# Altium PCB PCB.PcbDoc
Units mm, origin at the board's own origin, x right, y up, seen from the top; angles counter-clockwise.
Board outline 80 x 50 mm, 2 copper layers (Top Layer, Bottom Layer); 90 components, 124 nets, 399 pads, 259 vias.
Unrouted connection lines stored in the file: 2.
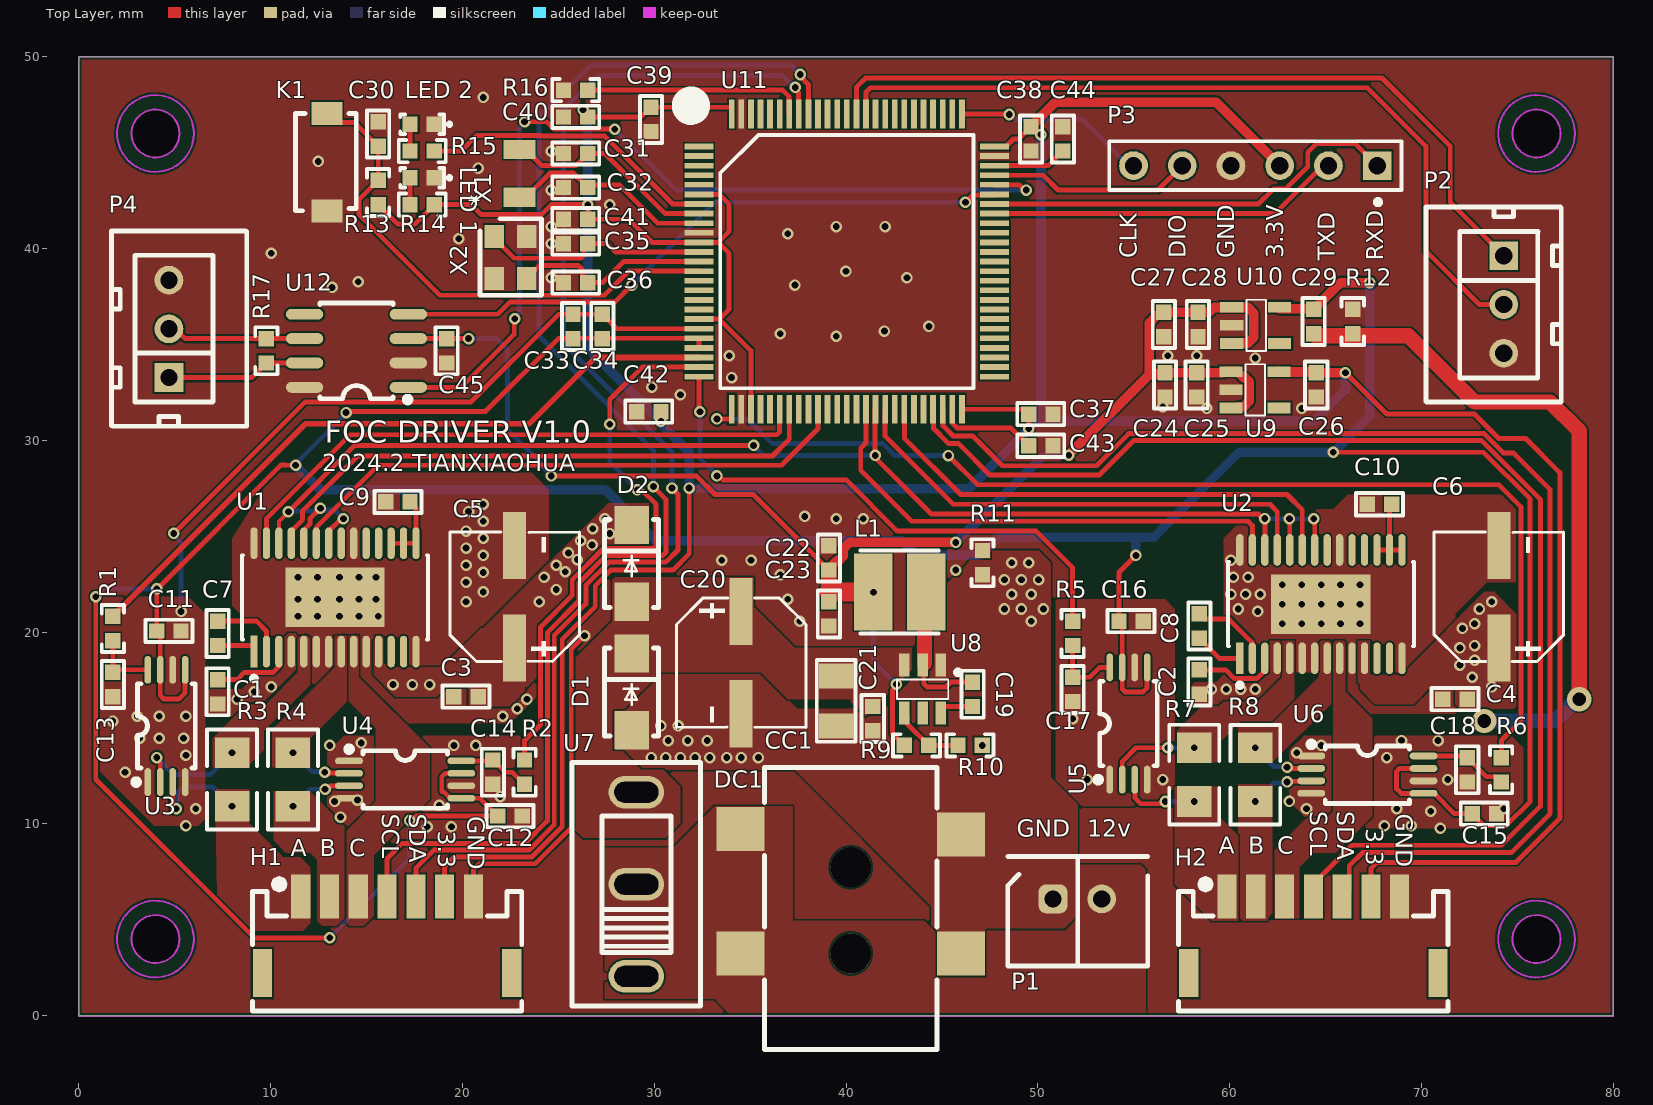
[diagram p0: Top Layer view]
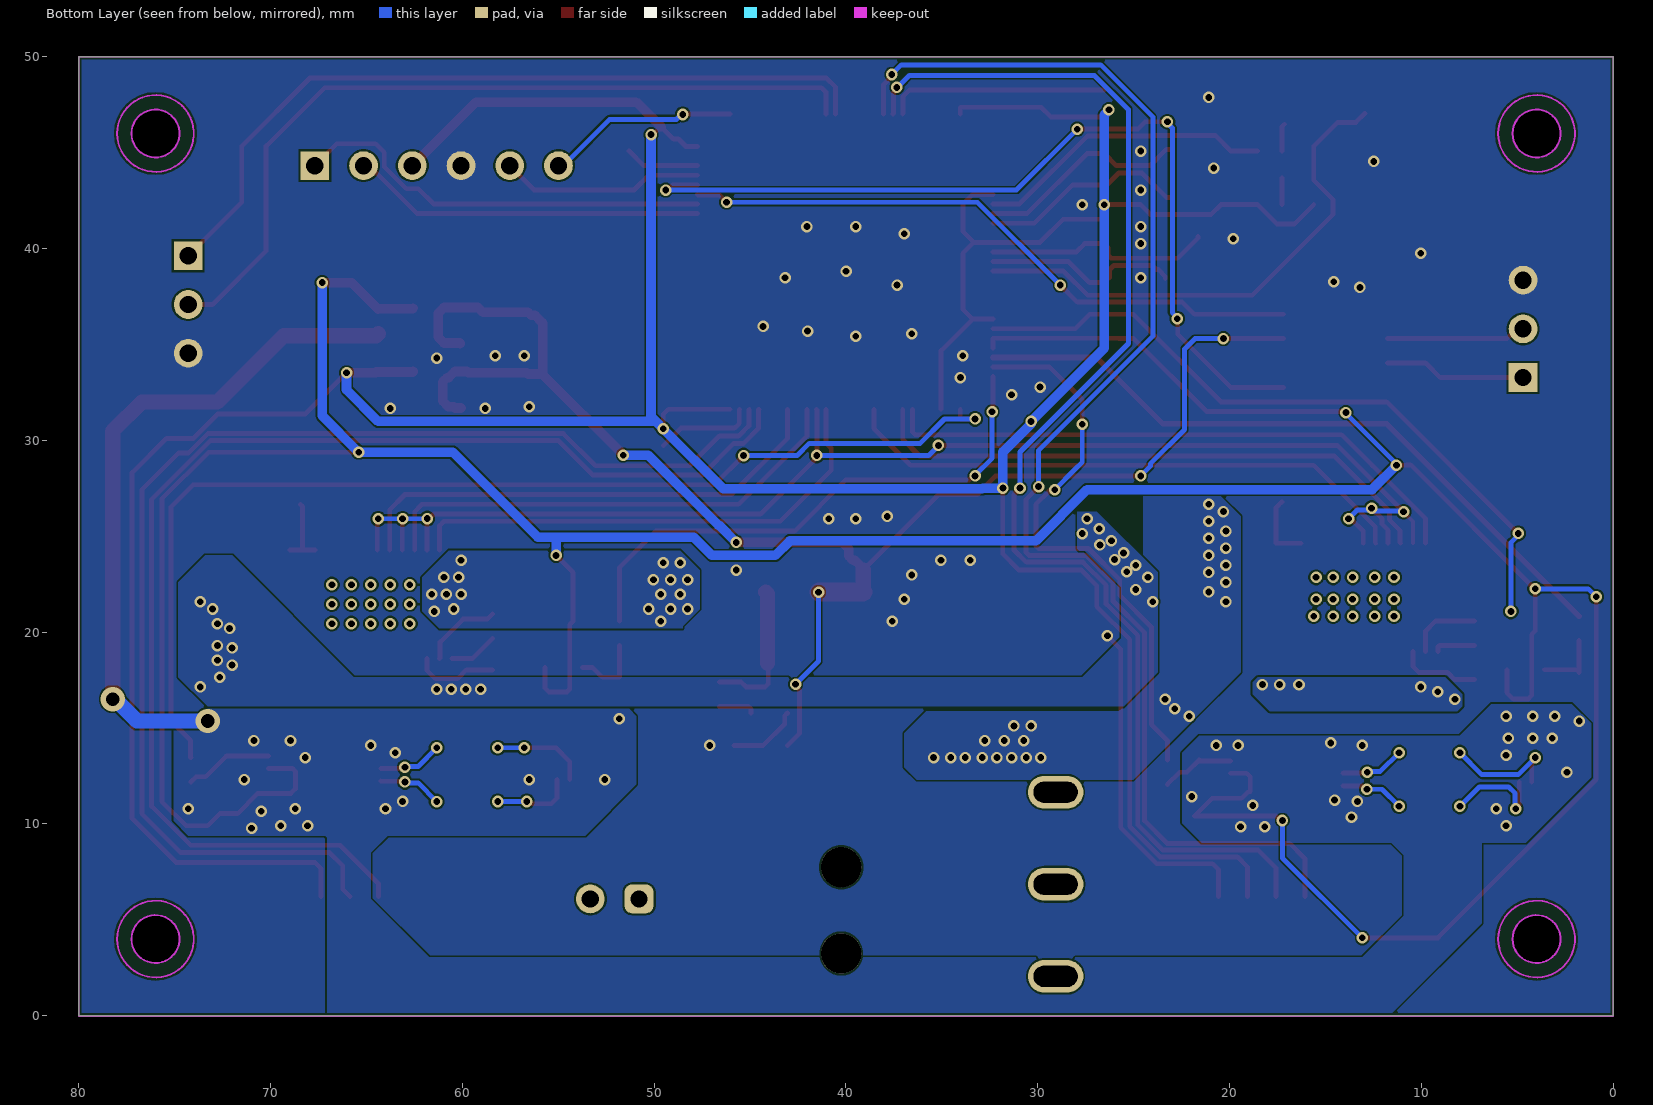
[diagram p1: Bottom Layer view, seen from below]
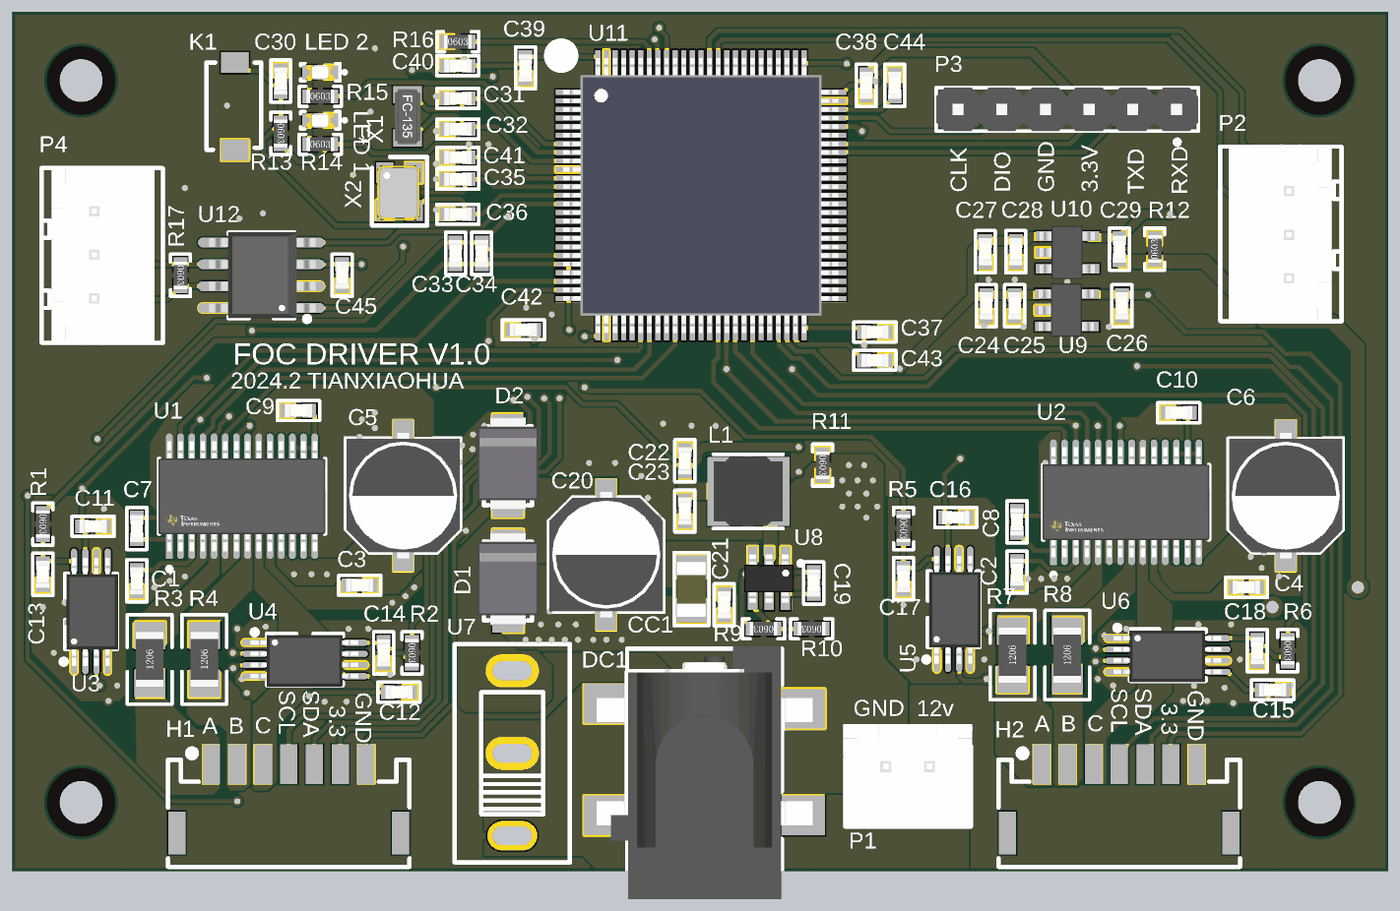
[diagram p2: 3D render of the assembled board from above, using the file's embedded part models]

## Layer stack, top to bottom
Top Solder: solder mask 0.0102, Solder Resist, Dk 3.5
Top Layer: signal copper 0.0356
Dielectric 1: dielectric 0.32, FR-4, Dk 4.8
Bottom Layer: signal copper 0.0356
Bottom Solder: solder mask 0.0102, Solder Resist, Dk 3.5

## Board outline
0,0 0,50 80,50 80,0
cut-out: 74.75,46 ccw(c76,46) 76,44.75 ccw(c76,46) 77.25,46 ccw(c76,46) 76,47.25 ccw(c76,46)
cut-out: 74.75,4 ccw(c76,4) 76,2.75 ccw(c76,4) 77.25,4 ccw(c76,4) 76,5.25 ccw(c76,4)
cut-out: 2.75,4 ccw(c4,4) 4,2.75 ccw(c4,4) 5.25,4 ccw(c4,4) 4,5.25 ccw(c4,4)
cut-out: 4,44.75 cw(c4,46) 2.75,46 cw(c4,46) 4,47.25 cw(c4,46) 5.25,46 cw(c4,46)

## Design rules (kind name [scope] priority, off if disabled: settings)
Clearance [All] p1: gap=0.1 ignorepadtopadclearanceinfootprint=FALSE except(0: Arc-Hole Track-Hole SMDPad-Hole THPad-Hole Via-Hole Fill-Hole Poly-Hole Region-Hole Text-Hole; 0.102: Arc-Arc Arc-Track Arc-SMDPad Arc-THPad Track-Track Track-SMDPad Track-THPad SMDPad-SMDPad SMDPad-THPad THPad-THPad; 0.127: Arc-Via Track-Via SMDPad-Via SMDPad-Text THPad-Via Via-Via; 0.254: Arc-Text Track-Text THPad-Text Via-Text Fill-Text Poly-Text Region-Text Text-Text)
HoleSize [All] p1: absolutevalues=TRUE maxlimit=30 minlimit=0.025 maxpercent=80.000 minpercent=20.000
HoleToHoleClearance [All] p1: gap=0.152 allowstackedmicrovias=TRUE
MinimumSolderMaskSliver [All] p1: minsoldermaskwidth=0
PlaneClearance [All] p1: clearance=0.254
PlaneConnect [All] p1: planeconnectstyle=Direct reliefexpansion=0.508 reliefentries=4 reliefconductorwidth=0.254 reliefairgap=0.254
PolygonConnect [All] p1: connectstyle=Direct reliefconductorwidth=0.254 reliefentries=4 polygonreliefangle="90 Angle" airgapwidth=0.254
RoutingVias [All] p1: holewidth=0.711 width=1.27 viastyle="Through Hole" minholewidth=0.3 minwidth=0.5 maxholewidth=30 maxwidth=30
SilkToSilkClearance [All] p1: silktosilkclearance=0
SilkToSolderMaskClearance [IsPad] p1: minsilkscreentomaskgap=0 clearancetoexposedcopper=TRUE
SolderMaskExpansion [All] p1: expansion=0.102 istentingtop=FALSE
Width [All] p1: maxlimit=3 minlimit=0.1 preferedwidth=0.254
23 further rules are at their usual default settings.

## Classes and differential pairs
component class Sheet3-can: C45 P4 R17 U12
component class Sheet0-MCU: C30 C31 C32 C33 C34 C35 C36 C37 C38 C39 C40 C41 C42 C43 C44 K1 "LED 1" "LED 2" P2 P3 R13 R14 R15 R16 U11 X1 X2
component class Sheet2-power: C19 C20 C21 C22 C23 C24 C25 C26 C27 C28 C29 CC1 D1 D2 DC1 L1 P1 R9 R10 R11 R12 U7 U8 U9 U10
component class Sheet1-driver: C1 C2 C3 C4 C5 C6 C7 C8 C9 C10 C11 C12 C13 C14 C15 C16 C17 C18 H1 H2 R1 R2 R3 R4 R5 R6 R7 R8 U1 U2 U3 U4 U5 U6

## Components (designator, comment, footprint, x,y, rotation, side; value= is the part's Value field where it differs from the comment)
C1 "100nF" CC1608-0603 7.239,16.891 r270 top
C2 "100nF" CC1608-0603 58.42,17.399 r270 top
C3 "100NF 50V" CC1608-0603 20.193,16.637 r180 top
C4 "100NF 50V" CC1608-0603 71.755,16.51 r180 top
C5 "35V 100uF" CAP-SMD_D6.3 22.723,21.847 r90 top
C6 "35V 100uF" CAP-SMD_D6.3 74.041,21.844 r90 top
C7 "0.01uF" CC1608-0603 7.239,19.939 r270 top
C8 "0.01uF" CC1608-0603 58.42,20.32 r270 top
C9 "0.47UF" CC1608-0603 16.637,26.797 r180 top
C10 "0.47UF" CC1608-0603 67.818,26.67 r180 top
C11 "100nF" CC1608-0603 4.699,20.066 r0 top
C12 "100nF" CC1608-0603 22.479,10.414 r0 top
C13 "2.2nF" CC1608-0603 1.778,17.272 r90 top
C14 "2.2nF" CC1608-0603 21.59,12.7 r90 top
C15 "100nF" CC1608-0603 73.279,10.541 r0 top
C16 "100nF" CC1608-0603 54.864,20.574 r0 top
C17 "2.2nF" CC1608-0603 51.816,17.018 r90 top
C18 "2.2nF" CC1608-0603 72.39,12.827 r90 top
C19 "100nF" CC1608-0603 46.599,16.764 r90 top
C20 "35V 100uF" CAP-SMD_D6.3 34.534,18.415 r270 top
C21 "100NF 50V" CC1608-0603 41.392,15.494 r90 top
C22 "22uf" CC1608-0603 39.106,23.876 r270 top
C23 "22uf" CC1608-0603 39.106,20.955 r90 top
C24 "2.2uf" CC1608-0603 56.632,32.893 r90 top
C25 "100nF" CC1608-0603 58.283,32.893 r90 top
C26 "10uF" CC1608-0603 64.516,32.893 r270 top
C27 "2.2uf" CC1608-0603 56.57,36.04 r90 top
C28 "100nF" CC1608-0603 58.348,36.04 r90 top
C29 "10uF" CC1608-0603 64.379,36.195 r270 top
C30 "1UF" CC1608-0603 15.611,45.974 r270 top
C31 "12pF" CC1608-0603 25.908,44.958 r0 top
C32 "12pF" CC1608-0603 25.908,43.18 r0 top
C33 "1uF" CC1608-0603 25.771,35.941 r270 top
C34 "100NF" CC1608-0603 27.295,35.941 r270 top
C35 "20pF" CC1608-0603 25.908,40.259 r0 top
C36 "20pF" CC1608-0603 25.908,38.227 r0 top
C37 "100NF" CC1608-0603 50.155,31.369 r180 top
C38 "100NF" CC1608-0603 49.647,45.72 r90 top
C39 "100NF" CC1608-0603 29.835,46.736 r90 top
C40 "100NF" CC1608-0603 25.908,46.863 r0 top
C41 "100NF" CC1608-0603 25.908,41.529 r0 top
C42 "100NF" CC1608-0603 29.718,31.496 r0 top
C43 "2.2UF" CC1608-0603 50.155,29.718 r180 top
C44 "2.2UF" CC1608-0603 51.308,45.72 r270 top
C45 "100nF" CC1608-0603 19.177,34.671 r270 top
CC1 "Cap Chip 1206" CC3216-1206 39.487,16.383 r90 top value="10UF 50V"
D1 "SMBJ24A" "DO-214 AA" 28.819,16.891 r270 top
D2 "SS34" "DO-214 AA" 28.819,23.59 r270 top
DC1 "DC-2.1" DC-IN-SMD_DC-050-25A 40.249,6.497 r180 top
H1 "ZH 1.5-7P" ZH1.5-7P 16.074,4.223 r0 top locked
H2 "ZH 1.5-7P" ZH1.5-7P 64.365,4.223 r0 top
K1 "KEY 3*4" "KEY 3*4" 12.944,47.05 r270 top
L1 "15uH" Inductor-4018 42.789,22.098 r180 top
"LED 1" "LED 0603" "LED 0603" 17.907,43.688 r0 top
"LED 2" "LED 0603" "LED 0603" 17.907,46.482 r0 top
P1 "Header 2" HX2.54-2 50.79,6.096 r0 top
P2 "Header 3" HX2.54-3 74.295,39.624 r270 top
P3 "Header 6" HDR1X6 67.691,44.323 r180 top
P4 "Header 3" HX2.54-3 4.699,33.274 r90 top
R1 "22R" CR1608-0603 1.778,20.193 r270 top
R2 "22R" CR1608-0603 23.241,12.7 r270 top
R3 "0.01R" CR3216-1206 7.991,12.319 r90 top
R4 "0.01R" CR3216-1206 11.166,12.322 r90 top
R5 "22R" CR1608-0603 51.816,19.939 r270 top
R6 "22R" CR1608-0603 74.158,12.827 r270 top
R7 "0.01R" CR3216-1206 58.156,12.573 r90 top
R8 "0.01R" CR3216-1206 61.341,12.57 r90 top
R9 "100K 1%" CR1608-0603 43.678,14.097 r180 top
R10 "13.3K 1%" CR1608-0603 46.472,14.097 r180 top
R11 "0R" CR1608-0603 47.117,23.622 r270 top
R12 "0R" CR1608-0603 66.421,36.195 r90 top
R13 "10K" CR1608-0603 15.611,42.926 r270 top
R14 "2K" CR1608-0603 17.907,42.291 r0 top
R15 "2K" CR1608-0603 17.907,45.085 r0 top
R16 "10KR" CR1608-0603 25.908,48.26 r0 top
R17 "120R" CR1608-0603 9.779,34.671 r270 top
U1 "DRV8313PWPR" HTSSOP-28 13.359,21.813 r90 top
U2 "DRV8313PWPR" HTSSOP-28 64.76,21.463 r90 top
U3 "INA240A1PWR" TSSOP-8 4.572,15.113 r0 top
U4 "INA240A1PWR" TSSOP-8 17.018,12.319 r270 top
U5 "INA240A1PWR" TSSOP-8 54.727,15.24 r0 top
U6 "INA240A1PWR" TSSOP-8 67.183,12.573 r270 top
U7 "HX SS12D10G4" SS12D10-G4 29.073,6.858 r90 top
U8 "TPS54202DDCR" SOT23-6 44.059,17.018 r180 top
U9 "SPX3819M5-L-3.3/TR" SOT23-5 60.071,31.684 r90 top
U10 "SPX3819M5-L-3.3/TR" SOT23-5 60.111,35.047 r90 top
U11 "STM32F407VET6   LQFP100" TQFP100 40.042,39.322 r0 top locked
U12 "TJA1050T" SOIC-8 14.478,34.671 r90 top
X1 "32.768kKHz" XTAL-3215 22.977,45.172 r270 top
X2 "3225_8M" XTAL-3225 23.358,40.64 r270 top

## Footprints (in the part's own frame and the unit in brackets; to place one, negate y for a bottom-side part, rotate by r counter-clockwise, add the part's x,y. Pads: shape width x height; smd on the part's side, far side on the other; paste and mask are expansions set on the pad)
CAP-SMD_D6.3 [mm] "直径6.3mm固态电容"
  rect 3.5x1.2 smd paste+0 mask+0.051: 1(-2.67,0) 2(2.67,0)
  silkscreen extent -3.38,-3.38 3.38,3.38, body extent -3.65,-3.3 3.65,3.3, height 5.9
CC1608-0603 [mm]
  rect 0.8x0.8 smd: 1(-0.635,0) 2(0.635,0)
  silkscreen extent -1.23,-0.58 1.23,0.58, body extent -0.8,-0.4 0.8,0.4, height 0.3
CC3216-1206 [mm]
  rect 1.3x1.8 smd: 1(-1.27,0) 2(1.333,0)
  silkscreen extent -2.1,-1.02 2.16,1.02, body extent -1.59,-0.85 1.61,0.85, height 1.76
CR1608-0603 [mm]
  rect 0.8x0.8 smd: 1(-0.635,0) 2(0.635,0)
  silkscreen extent -1.23,-0.58 1.23,0.58, body extent -0.8,-0.4 0.8,0.4, height 0.45
CR3216-1206 [mm]
  rect 1.6x1.8 smd: 1(-1.4,0) 2(1.4,0)
  silkscreen extent -2.6,-1.3 2.6,1.3, body extent -1.6,-0.8 1.6,0.8, height 0.6
DC-IN-SMD_DC-050-25A [mm]
  rect 2.5x2.3 smd: 1(5.75,3.25) 1(5.75,-3.25) 2(-5.75,3.25) 3(-5.75,-2.95)
  round 2.1 hole 2.1 unplated: ""(0,3.25) ""(0,-1.25)
  silkscreen extent -4.5,-6.45 4.5,8.25, body extent -6.28,-6.57 6.28,8.13, height 10.94
"DO-214 AA" [mm] "SMB"
  rect 2x1.8 smd: 1(-2,0) 2(2,0)
  silkscreen extent -2.3,-1.4 2.3,1.4, body extent -2.83,-1.8 2.57,1.8, height 2.4
HDR1X6 [mm] "Connector; Header; 6 Position"
  rect 1.5x1.5 hole 0.9: 1(0,0)
  round 1.5 hole 0.9: 2(2.54,0) 3(5.08,0) 4(7.62,0) 5(10.16,0) 6(12.7,0)
  silkscreen extent -1.27,-1.27 13.97,2.04, body extent -1.27,-1.27 13.97,1.27, height 8.54
HTSSOP-28 [mm]
  rect 1.655x0.381 smd paste+0 mask+0: 1(-2.825,4.225)
  rrect100% 1.655x0.381 smd paste+0 mask+0: 2(-2.825,3.575) 3(-2.825,2.925) 4(-2.825,2.275) 5(-2.825,1.625) 6(-2.825,0.975) 7(-2.825,0.325) 8(-2.825,-0.325) 9(-2.825,-0.975) 10(-2.825,-1.625) 11(-2.825,-2.275) 12(-2.825,-2.925) 13(-2.825,-3.575) 14(-2.825,-4.225) 15(2.825,-4.225) 16(2.825,-3.575) 17(2.825,-2.925) 18(2.825,-2.275) 19(2.825,-1.625) 20(2.825,-0.975) 21(2.825,-0.325) 22(2.825,0.325) 23(2.825,0.975) 24(2.825,1.625) 25(2.825,2.275) 26(2.825,2.925) 27(2.825,3.575) 28(2.825,4.225)
  rect 3.1x5.18 smd paste-1000 mask+0: 29(0,0)
  silkscreen extent -4.35,-4.85 2.2,4.85, body extent -3.9,-5.1 3.9,5.1, height 0.25
HX2.54-2 [mm] "两针白色插座（已加焊）"
  rrect50% 1.5x1.5 hole 0.9: 1(0,0)
  round 1.5 hole 0.9: 2(2.54,0)
  silkscreen extent -2.36,-3.5 4.94,2.2, body extent -2.48,-3.55 5.02,2.45, height 7
HX2.54-3 [mm]
  rect 1.5x1.5 hole 0.9: 1(0,0)
  round 1.5 hole 0.9: 2(2.54,0) 3(5.08,0)
  silkscreen extent -2.54,-4.06 7.63,3, body extent -2.41,-3.58 7.59,2.42, height 7
Inductor-4018 [mm]
  rect 2x4 smd paste+0 mask+0.051: 1(-1.397,0) 2(1.373,0)
  silkscreen extent -2.03,-2.16 2.03,2.16, body extent -2,-2 2,2, height 1.8
"KEY 3*4" [mm]
  rect 1.2x1.6 smd: 1(0,0) 2(5.1,0)
  silkscreen extent 0,-1.65 5.08,1.52, body extent 0.25,-1.71 4.7,1.46, height 2.01
"LED 0603" [mm]
  rect 0.8x0.8 smd: 1(-0.635,0) 2(0.635,0)
  silkscreen extent -1.14,-0.51 1.48,0.51, body extent -0.8,-0.4 0.8,0.4, height 0.6
SOIC-8 [mil]
  oval 22.38x76.78 smd paste+0 mask+2: 1(-75,-106.5) 2(-25,-106.5) 3(25,-106.5) 4(75,-106.5) 5(75,106.5) 6(25,106.5) 7(-25,106.5) 8(-75,106.5)
  silkscreen extent -106,-111 98,75, body extent -98,-125 98,120, height 69
SOT23-5 [mm] "适用于MIC5205"
  rect 0.55x1.2 smd: 1(1.905,0) 2(0.955,0) 3(0.005,0) 4(0.005,-2.5) 5(1.905,-2.5)
  silkscreen extent -0.38,-1.78 2.29,-0.76, body extent -0.6,-2.82 2.5,0.38, height 1.45
SOT23-6 [mm]
  rect 0.55x1.2 smd: 1(-0.889,-1.27) 2(0.061,-1.27) 3(1.011,-1.27) 4(1.011,1.23) 5(0.061,1.23) 6(-0.889,1.23)
  silkscreen extent -1.91,-1.02 1.4,0.51, body extent -1.39,-1.4 1.51,1.4, height 1.45
SS12D10-G4 [mm]
  oval 1.7x2.9 hole 1.1 slot 2.3 at 90 deg: 1(-4.8,0) 2(0,0) 3(4.8,0)
  silkscreen extent -6.35,-3.35 6.35,3.35, body extent -6.32,-3.25 6.3,3.25, height 9.3
TQFP100 [mm]
  rect 1.5x0.3 smd: 1(-7.7,6) 2(-7.7,5.5) 3(-7.7,5) 4(-7.7,4.5) 5(-7.7,4) 6(-7.7,3.5) 7(-7.7,3) 8(-7.7,2.5) 9(-7.7,2) 10(-7.7,1.5) 11(-7.7,1) 12(-7.7,0.5) 13(-7.7,0) 14(-7.7,-0.5) 15(-7.7,-1) 16(-7.7,-1.5) 17(-7.7,-2) 18(-7.7,-2.5) 19(-7.7,-3) 20(-7.7,-3.5) 21(-7.7,-4) 22(-7.7,-4.5) 23(-7.7,-5) 24(-7.7,-5.5) 25(-7.7,-6) 51(7.7,-6) 52(7.7,-5.5) 53(7.7,-5) 54(7.7,-4.5) 55(7.7,-4) 56(7.7,-3.5) 57(7.7,-3) 58(7.7,-2.5) 59(7.7,-2) 60(7.7,-1.5) 61(7.7,-1) 62(7.7,-0.5) 63(7.7,0) 64(7.7,0.5) 65(7.7,1) 66(7.7,1.5) 67(7.7,2) 68(7.7,2.5) 69(7.7,3) 70(7.7,3.5) 71(7.7,4) 72(7.7,4.5) 73(7.7,5) 74(7.7,5.5) 75(7.7,6)
  rect 0.3x1.5 smd: 26(-6,-7.7) 27(-5.5,-7.7) 28(-5,-7.7) 29(-4.5,-7.7) 30(-4,-7.7) 31(-3.5,-7.7) 32(-3,-7.7) 33(-2.5,-7.7) 34(-2,-7.7) 35(-1.5,-7.7) 36(-1,-7.7) 37(-0.5,-7.7) 38(0,-7.7) 39(0.5,-7.7) 40(1,-7.7) 41(1.5,-7.7) 42(2,-7.7) 43(2.5,-7.7) 44(3,-7.7) 45(3.5,-7.7) 46(4,-7.7) 47(4.5,-7.7) 48(5,-7.7) 49(5.5,-7.7) 50(6,-7.7) 76(6,7.7) 77(5.5,7.7) 78(5,7.7) 79(4.5,7.7) 80(4,7.7) 81(3.5,7.7) 82(3,7.7) 83(2.5,7.7) 84(2,7.7) 85(1.5,7.7) 86(1,7.7) 87(0.5,7.7) 88(0,7.7) 89(-0.5,7.7) 90(-1,7.7) 91(-1.5,7.7) 92(-2,7.7) 93(-2.5,7.7) 94(-3,7.7) 95(-3.5,7.7) 96(-4,7.7) 97(-4.5,7.7) 98(-5,7.7) 99(-5.5,7.7) 100(-6,7.7)
  silkscreen extent -8.63,-6.6 6.6,8.63, body extent -8,-8 8,8, height 1.61
TSSOP-8 [mm]
  oval 0.353x1.454 smd: 1(-0.975,-2.927) 2(-0.325,-2.927) 3(0.325,-2.927) 4(0.975,-2.927) 5(0.975,2.927) 6(0.325,2.927) 7(-0.325,2.927) 8(-0.975,2.927)
  silkscreen extent -1.73,-3.08 1.5,2.2, body extent -1.43,-3.17 1.57,3.11, height 1.09
XTAL-3215 [mm]
  rect 1x1.65 smd: 1(0,0) 2(2.5,0)
  body extent -0.33,-0.75 2.87,0.75, height 0.8
XTAL-3225 [mm]
  rect 1.2x1 smd: 1(0,-1.7) 2(2.2,-1.7) 3(2.2,0) 4(0,0)
  silkscreen extent -0.91,-2.44 3.07,0.76, body extent -0.43,-2.15 2.77,0.35, height 0.61
ZH1.5-7P [mm]
  rect 1x2.3 smd paste+0 mask+0.05: 1(-4.5,2) 2(-3,2) 3(-1.5,2) 4(0,2) 5(1.5,2) 6(3,2) 7(4.5,2)
  rect 1x2.5 smd paste+0 mask+0.05: 8(6.5,-2) 9(-6.5,-2)
  silkscreen extent -7.02,-3.97 7.02,3.04, body extent -6.96,-4.36 6.96,2.69, height 4

## Part data
C1 C2 C3 C4 C7 C8 C9 C10 C11 C12 C13 C14 C15 C16 C17 C18 C19 C21 C22 C23 C24 C25 C27 C28 C30 C31 C32 C33 C34 C35 C36 C37 C38 C39 C40 C41 C42 C43 C44 C45: library part "Cap Chip 0603", "0603封装的电容", Published=8-Jun-2000, Publisher="Altium Limited", Revision="July-2002: Re-released for DXP Platform."
C5 C6 C20: library part "Cap ECAP SMD", "铝点解电容", BOM_Manufacturer=PANASONIC, BOM_Manufacturer Part=EEEFP1C681AP, BOM_Supplier=LCSC, BOM_Supplier Part=C413527, Contributor=LCSC, nameAlias=Capacitance, spicePre=C, spiceSymbolName=EEEFP1C681AP
C26 C29: library part "Chip capacitor", "贴片电容"
CC1: "Polarized Capacitor (Radial)", Published=8-Jun-2000, Publisher="Altium Limited", Revision="July-2002: Re-released for DXP Platform."
D1: library part SMBJ18A, "TVS稳压二极管"
D2: "肖特基二极管"
DC1: library part DC-050, "DC贴片插座", BOM_JLCPCB Part Class="Extended Part", BOM_Manufacturer=韩国韩荣, BOM_Manufacturer Part=DC-050-25A, BOM_Supplier=LCSC, BOM_Supplier Part=C707275, Contributor=LCSC, spicePre=D, spiceSymbolName=DC-050-25A
H1 H2: "ZH1.5-7P 间距1.5的贴片连接座"
K1: "轻触开关按键"
L1: library part Inductor-4018, "贴片电感 1206封装"
P1: "Header, 2-Pin", LatestRevisionDate=17-Jul-2002, LatestRevisionNote="Re-released for DXP Platform.", Publisher="Altium Limited"
P2 P4: "Header, 3-Pin", LatestRevisionDate=17-Jul-2002, LatestRevisionNote="Re-released for DXP Platform.", Publisher="Altium Limited"
P3: "Header, 6-Pin", LatestRevisionDate=17-Jul-2002, LatestRevisionNote="Re-released for DXP Platform.", Publisher="Altium Limited"
R1 R2 R5 R6 R9 R10 R11 R12 R13 R14 R15 R16 R17: library part "Resistor Chip 0603", "0603封装电阻", Published=8-Jun-2000, Publisher="Altium Limited", Revision="July-2002: Re-released for DXP Platform."
R3 R4 R7 R8: library part "Resistor Chip 1206", "1206封装电阻", Published=8-Jun-2000, Publisher="Altium Limited", Revision="July-2002: Re-released for DXP Platform."
U1 U2: library part DRV8313, "独立控制的半 H 桥驱动器,主要用于驱动一个三项无刷电机IC MOTOR DRIVER 8V-60V 28HTSSOP", Case/Package=HTSSOP, Max Operating Temperature=125°C, Max Supply Voltage=60V, Min Operating Temperature=-40°C, Min Supply Voltage=8V, Output Current=1.75A, Package Quantity=2000, Interface=Parallel, Lead Free="Lead Free", Logic Function="AND GATE", Mount="Surface Mount", Number of Outputs=1, Number of Pins=28, Packaging="Tape and Reel", Series=-
U3 U4 U5 U6: "超精密电流检测放大器"
U7: library part SS12D10G4, BOM_JLCPCB Part Class="Extended Part", BOM_Manufacturer=hanxia(韩下), BOM_Manufacturer Part="HX SS12D10G4", BOM_Supplier=LCSC, BOM_Supplier Part=C5149841, Contributor=lcsc, link=https://atta.szlcsc.com/upload/public/pdf/source/20220907/2020D7183ED16DD6E2B9F5A13FB144CF.pdf, spicePre=U, spiceSymbolName="HX SS12D10G4"
U8: "同步降压转换器芯片 500Khz 4.2~28V输入，2A输出"
U9 U10: "LDO 3.3V , SOT-23-5 500ma"
U11: library part STM32F407VET6, "168M单片机"
U12: "1Mhz Can芯片，兼容3.3~5V设备", BOM_JLCPCB Part Class="Basic Part", BOM_Manufacturer=NXP(恩智浦), BOM_Manufacturer Part=TJA1050T/CM,118, BOM_Supplier=LCSC, BOM_Supplier Part=C6952, spicePre=U, spiceSymbolName=TJA1050T/CM,118
X1: library part "XTAL 3215 32.768kKHz", "3215封装的时钟晶振"
X2: library part "XTAL 3225", "3225封装的晶振"

## Via types
v1: diameter 0.6, hole 0.35, Top Layer to Bottom Layer, tented both sides, 257 vias
v2: diameter 1.27, hole 0.711, Top Layer to Bottom Layer, tented both sides, 2 vias

## Nets (pads, with @x,y where several pads share a name; then routed paths per layer and width w, separated by ;. In a path a pad name is that pad's centre, name@x,y a point inside that pad or via, vN(x,y) a via of type N, cw(c..) or ccw(c..) an arc to the next point about the centre after c; other vN are vias at no path point)
3.3V: C26.1 C37.2 C38.2 C39.2 C40.2 C41.2 C42.2 H1.6 H2.6 P3.3 R13.2 R14.2 U9.5 U11.6 U11.11 U11.19 U11.28 U11.50 U11.75 U11.100 | length 218.4
  Top Layer w0.254: R13.2 16.627,41.275 17.526,41.275 R14.2 20.447,42.291 20.955,41.783 24.13,41.783 24.638,42.291 v1(26.543,42.291) C41.2 28.679,41.529 29.886,40.322 U11.11 33.337,40.322 ; H1.6 19.074,7.771 19.583,8.28 23.622,8.28 25.209,9.868 25.209,19.621 26.924,21.336 26.924,22.421 27.744,23.241 30.988,23.241 31.826,24.079 31.826,27.504 v1(31.817,27.513) ; v1(26.289,47.244) 26.289,47.117 C40.2 29.327,46.863 C39.2 34.019,47.371 34.042,47.348 U11.100 ; U11.19 33.401,36.322 ; U11.6 33.401,42.822 33.909,42.314 33.909,40.894 33.337,40.322 ; U11.28 35.042,34.681 33.401,36.322 ; U11.50 49.267,31.622 C37.2 49.53,31.359 v1(49.53,30.607) ; U11.75 48.342,45.322 48.733,45.714 49.005,45.714 C38.2 49.994,46.008 50.097,46.008 v1(50.164,45.942) ; v1(66.04,33.528) 68.193,31.375 72.749,31.375 74.026,30.099 75.438,30.099 77.216,28.321 77.216,10.287 74.93,8.001 67.691,8.001 67.365,7.675 H2.6 ; 33.337,40.322 33.909,39.75 33.909,36.83 33.401,36.322
  Top Layer w0.5: C38.2 50.927,47.635 59.299,47.635 P3.3 ; U9.5 62.596,33.564 64.48,33.564 C26.1 v1(66.04,33.528)
  Bottom Layer w0.5: v1(26.289,47.244) 26.289,47.217 26.543,46.963 26.543,34.798 v1(30.353,30.988) 30.353,30.861 31.817,29.397 v1(31.817,27.513) 31.837,27.494 32.864,27.494 32.887,27.471 46.394,27.471 v1(49.53,30.607) 49.911,30.988 ; v1@50.165,45.974 50.165,31.242 49.911,30.988 ; v1(66.04,33.528) 66.04,32.639 64.389,30.988 49.911,30.988
5V: C22.2 C23.2 C24.2 C25.2 C27.2 C28.2 C45.1 L1.2 R9.2 U9.1 U9.3 U10.1 U10.3 U12.3 | length 81.7
  Top Layer w0.254: U12.3 C45.1 v1(20.32,35.306) ; v1(24.638,28.148) 32.198,28.148 33.168,27.178 35.169,27.178 C22.2 ; L1.2 v1(41.431,22.083) ; v1(42.632,17.285) 42.632,17.191 42.418,16.977 42.418,14.722 R9.2
  Top Layer w0.5: C22.2 39.256,23.391 39.256,23.467 39.549,23.759 39.652,23.759 39.858,23.965 39.858,24.345 40.192,24.68 v1(45.72,24.68) ; v1(51.608,29.231) 55.838,33.461 ; U9.3 60.396,31.689 60.457,31.75 60.73,31.75 61.023,32.043 61.023,33.06 60.817,33.266 60.719,33.266 60.396,33.589 U9.1 59.746,33.589 59.685,33.528 C25.2 C24.2 56.565,33.461 55.838,33.461 ; U10.3 60.136,35.077 60.964,35.077 61.254,35.367 61.254,36.634 60.961,36.927 59.191,36.927 58.939,36.675 C28.2 C27.2 56.42,36.525 56.212,36.525 55.818,36.13 55.818,33.481 55.838,33.461
  Top Layer w0.8: 39.106,22.098 C22.2
  Top Layer w1: 39.106,22.098 L1.2
  Bottom Layer w0.254: v1(20.32,35.306) 21.807,35.306 22.352,34.761 22.352,30.561 24.13,28.783 24.13,28.656 v1(24.638,28.148) ; v1(41.431,22.083) 41.431,18.486 v1(42.632,17.285)
  Bottom Layer w0.5: v1(45.72,24.68) 46.618,25.578 46.66,25.578 50.313,29.231 v1(51.608,29.231)
ADC1_IN0: R1.1 U11.23 | length 36.2
  Top Layer w0.3: R1.1 11.811,30.861 23.475,30.861 26.936,34.322 U11.23
ADC1_IN1: R2.1 U11.24 | length 29.6
  Top Layer w0.254: R2.1 23.241,14.351 24.079,15.189 24.079,20.269 25.726,21.916 25.726,22.732 27.356,24.361 29.95,24.361 30.099,24.51 30.099,26.67 29.412,27.357 29.19,27.357 v1(29.124,27.423) ; v1(27.686,30.847) 27.686,32.131 29.377,33.822 U11.24
  Bottom Layer w0.254: v1(27.686,30.847) 27.686,28.861 28.067,28.48 v1(29.124,27.423)
ADC2_IN2: R5.1 U11.25 | length 28.9
  Top Layer w0.254: U11.25 32.342,31.539 v1(32.385,31.496) ; v1(33.274,28.148) 33.368,28.148 33.576,27.94 40.005,27.94 42.672,25.273 49.911,25.273 51.816,23.368 R5.1
  Bottom Layer w0.254: v1(32.385,31.496) 32.385,29.079 33.274,28.19 v1(33.274,28.148)
ADC2_IN3: R6.1 U11.26 | length 58.6
  Top Layer w0.254: v1(33.274,31.115) 34.019,31.115 34.042,31.138 U11.26 ; v1(45.339,29.21) 46.863,27.686 74.041,27.686 75.184,26.543 75.184,15.367 74.168,14.351 74.168,13.472 R6.1
  Bottom Layer w0.254: v1(33.274,31.115) 34.865,31.115 36.135,29.845 41.91,29.845 42.545,29.21 v1(45.339,29.21)
AGND: C11.2 C12.2 C13.1 C14.1 C15.2 C16.2 C17.1 C18.1 C29.2 C33.1 C34.1 R12.1 U3.1 U3.4 U3.6 U4.1 U4.4 U4.6 U5.1 U5.4 U5.6 U6.1 U6.4 U6.6 U11.20 | length 72
  Top Layer w0.254: v1(4.953,25.146) 11.811,32.004 20.447,32.004 25.019,36.576 C33.1 C34.1 28.049,35.822 U11.20
  Top Layer w0.8: C29.2 64.491,35.448 69.327,35.448 72.771,32.004 76.708,32.004 78.232,30.48 v2(78.232,16.51)
  Bottom Layer w0.254: v1(4.953,25.146) 4.953,25.052 5.334,24.671 v1(5.334,21.082)
  Bottom Layer w0.8: v2(73.269,15.367) 76.962,15.367 78.105,16.51 v2(78.232,16.51)
  other v1: 70.993,9.779 18.161,9.86 19.431,9.86 5.588,9.906 68.072,9.906 69.469,9.906 13.646,10.365 70.485,10.668 6.096,10.795 64.008,10.795 68.707,10.795 74.295,10.795 18.796,10.968 13.335,11.176 63.119,11.176 14.527,11.246 21.971,11.43 52.578,12.319 56.515,12.319 71.374,12.319 2.413,12.7 68.199,13.462 5.588,13.589 63.5,13.716 13.081,14.097 19.558,14.097 20.701,14.097 64.77,14.097 14.732,14.224 68.961,14.351 70.866,14.351 3.175,14.478 4.191,14.478 5.461,14.478 1.778,15.367 51.816,15.494 3.048,15.621 4.191,15.621 5.588,15.621
BOOT0: R16.2 U11.94 | length 11.5
  Top Layer w0.254: R16.2 36.703,48.26 37.019,47.944 37.019,47.045 U11.94
CAN1_RX: U11.70 U12.4 | length 33.1
  Top Layer w0.254: U12.4 21.844,36.576 22.479,37.211 27.94,37.211 v1(28.829,38.1) ; v1(46.228,42.418) 46.611,42.801 47.721,42.801 U11.70
  Bottom Layer w0.254: v1(28.829,38.1) 33.147,42.418 v1(46.228,42.418)
CAN1_TX: U11.71 U12.1 | length 47.4
  Top Layer w0.254: U12.1 19.939,32.766 22.701,35.528 22.701,36.305 v1(22.733,36.336) ; v1(23.241,46.609) 24.404,46.609 24.785,46.228 v1(27.94,46.228) ; U11.71 49.04,43.322 49.309,43.053 v1(49.403,43.053)
  Bottom Layer w0.254: v1(22.733,36.336) 22.733,36.404 22.987,36.658 22.987,46.287 23.241,46.541 v1(23.241,46.609) ; v1(27.94,46.228) 31.115,43.053 v1(49.403,43.053)
CANH: P4.1 R17.2 U12.7 | length 7.4
  Top Layer w0.254: P4.1 9.017,33.274 R17.2 U12.7
CANL: P4.2 R17.1 U12.6 | length 7.3
  Top Layer w0.254: P4.2 5.036,35.814 5.544,35.306 R17.1 U12.6
DRV_EN: U1.22 U1.24 U1.26 U2.22 U2.24 U2.26 U11.41 | length 72.8
  Top Layer w0.2: U1.26 10.434,25.78 v1@11.009,26.355
  Top Layer w0.254: v1(10.933,26.278) 14.393,29.739 v1(35.179,29.739) ; U1.24 11.734,25.31 12.053,25.628 12.053,25.917 v1(12.602,26.466) ; U1.22 13.034,25.275 13.6,25.842 13.734,25.842 v1(13.8,25.908) ; U11.41 41.519,31.599 41.519,29.22 v1(41.527,29.213) 41.656,29.083 41.656,28.956 44.45,26.162 61.501,26.162 61.741,25.922 v1(61.835,25.922) U2.26 ; v1(63.119,25.908) 63.135,25.892 U2.24 ; v1@64.389,25.781 64.435,25.735 U2.22
  Bottom Layer w0.254: v1(10.933,26.278) 10.979,26.325 12.65,26.325 v1@12.697,26.371 ; v1(12.602,26.466) v1@12.697,26.371 ; v1(13.8,25.908) 13.337,26.371 v1@12.697,26.371 ; v1(35.179,29.739) 35.179,29.716 35.683,29.213 v1(41.527,29.213) ; v1(61.835,25.922) 61.842,25.915 64.382,25.915 v1(64.389,25.908)
GND: "LED 1.2" "LED 2.2" C22.1 C23.1 C24.1 C25.1 C26.2 C27.1 C28.1 C30.1 C31.1 C32.1 C35.1 C36.1 C37.1 C38.1 C39.1 C40.1 C41.1 C42.1 C43.1 C44.1 C45.2 H1.7 H2.7 K1.2 P2.3 P3.4 P4.3 R10.1 R11.1 R12.2 R16.1 U9.2 U10.2 U11.10 U11.27 U11.74 U11.99 U12.2 U12.8 X2.2 X2.4 | length 17.7
  Top Layer w0.254: H1.7 20.574,7.62 20.879,7.925 23.8,7.925 25.678,9.803 25.678,19.121 v1(26.369,19.812)
  other v1: 47.107,14.097 37.592,20.574 36.957,21.717 36.576,22.987 45.72,23.241 33.528,23.749 35.052,23.749 39.497,25.908 40.894,25.908 37.846,26.035 58.801,31.665 63.754,31.665 56.515,31.75 31.369,32.385 29.882,32.78 34.036,33.274 61.341,34.29 33.909,34.417 56.769,34.417 58.293,34.417 39.497,35.433 36.576,35.56 42.003,35.702 44.323,35.941 13.208,37.973 37.338,38.1 14.57,38.271 24.638,38.481 43.18,38.481 39.999,38.816 10.033,39.751 24.638,40.259 19.812,40.513 36.957,40.767 24.638,41.148 39.497,41.148 42.037,41.148 27.686,42.291 24.638,43.053 20.828,44.196 12.483,44.543 24.638,45.085 21.082,47.879
HSE_I: C35.2 U11.12 X2.1 | length 11.9
  Top Layer w0.254: X2.1 21.658,40.54 22.701,39.497 26.177,39.497 26.325,39.646 26.325,40.041 C35.2 27.559,40.259 27.996,39.822 U11.12
HSE_O: C36.2 U11.13 X2.3 | length 10.4
  Top Layer w0.254: X2.3 23.358,38.54 23.731,38.913 23.831,38.913 24.034,39.116 26.035,39.116 26.27,38.881 26.27,38.5 C36.2 27.305,38.227 28.4,39.322 U11.13
I2C1_SCL: H1.4 U11.92 | length 72
  Top Layer w0.254: H1.4 16.074,8.2 16.866,8.992 23.266,8.992 24.435,10.16 24.435,19.98 26.082,21.627 26.082,22.585 27.503,24.006 30.458,24.006 30.607,24.155 30.607,26.931 29.958,27.579 v1(29.958,27.594) ; v1(37.613,49.075) 37.613,48.981 38.042,48.552 U11.92
  Bottom Layer w0.254: v1(29.958,27.594) 29.958,29.478 28.829,30.607 24.003,35.433 24.003,46.863 26.716,49.576 37.112,49.576 v1(37.613,49.075)
I2C1_SDA: H1.5 U11.93 | length 68.3
  Top Layer w0.254: H1.5 17.574,7.699 18.511,8.636 23.475,8.636 24.79,9.952 24.79,19.832 26.437,21.479 26.437,22.437 27.65,23.65 30.606,23.65 31.242,24.287 31.242,27.191 30.928,27.505 v1(30.928,27.513) ; v1(37.349,48.398) 37.349,48.304 37.519,48.134 37.519,47.045 U11.93
  Bottom Layer w0.254: v1(30.928,27.513) 30.928,29.397 25.273,35.052 25.273,47.244 27.051,49.022 36.703,49.022 37.327,48.398 v1(37.349,48.398)
I2C2_SCL: H2.4 U11.47 | length 65.8
  Top Layer w0.254: U11.47 44.565,31.599 44.565,30.619 45.339,29.845 45.847,29.845 47.498,28.194 53.213,28.194 55.016,29.997 73.121,29.997 74.163,28.956 74.168,28.956 76.2,26.924 76.2,10.922 74.168,8.89 66.382,8.89 64.365,6.873 H2.4
I2C2_SDA: H2.5 U11.48 | length 65.5
  Top Layer w0.254: U11.48 45.065,31.599 45.065,30.754 45.593,30.226 46.609,30.226 48.158,28.677 53.061,28.677 54.737,30.353 73.269,30.353 74.285,29.337 74.803,29.337 76.708,27.432 76.708,10.541 74.676,8.509 66.929,8.509 66.238,7.818 66.238,6.596 H2.5
LSE_I: C31.2 U11.8 X1.1 | length 11.3
  Top Layer w0.254: X1.1 23.302,45.172 24.151,44.323 25.908,44.323 C31.2 27.432,44.958 30.568,41.822 U11.8
LSE_O: C32.2 U11.9 X1.2 | length 11.1
  Top Layer w0.254: X1.2 23.302,42.672 24.572,43.942 25.781,43.942 C32.2 26.67,43.307 28.194,43.307 30.179,41.322 U11.9
M1_CS1: R3.2 U1.5 U3.2 | length 6.1
  Top Layer w0.254: v1(4.064,13.462) 4.064,13.368 4.247,13.185 U3.2
  Bottom Layer w0.254: v1(4.064,13.462) 4.953,12.573 6.845,12.573 v1(7.991,13.719)
M1_CS2: R4.2 U1.8 U4.2 | length 3.4
  Top Layer w0.254: v1(12.827,12.7) 12.864,12.663 14.072,12.663 U4.2
  Bottom Layer w0.254: v1(11.166,13.722) 12.146,12.742 12.785,12.742 v1(12.827,12.7)
M1_CS3: H1.3 U1.9
M2_CS1: R7.2 U2.5 U5.2 | length 5
  Top Layer w0.254: U5.2 54.402,13.254 55.121,13.973 v1(56.772,13.973)
  Bottom Layer w0.254: v1(56.772,13.973) v1(58.156,13.973)
M2_CS2: R8.2 U2.8 U6.2 | length 3.4
  Top Layer w0.254: v1(62.992,12.954) 63.048,12.898 U6.2
  Bottom Layer w0.254: v1(61.341,13.97) 62.311,13 62.946,13 v1(62.992,12.954)
M2_CS3: H2.3 U2.9
M_PWR: C1.2 C2.2 C3.1 C4.1 C5.1 C6.1 D2.1 U1.4 U1.11 U2.4 U2.11
  other v1: 8.255,16.51 9.144,16.891 59.055,17.018 59.817,17.018 60.579,17.018 61.341,17.018 10.033,17.145 73.66,17.145 16.383,17.272 17.399,17.272 18.288,17.272 72.644,17.653 72.009,18.288 72.771,18.542 72.009,19.177 72.771,19.304 72.136,20.193 72.771,20.447 73.025,21.209 24.003,21.59 73.66,21.59 24.892,22.225 24.257,22.86 25.362,23.152 24.892,23.495 25.997,23.787 25.527,24.13 26.759,24.549 26.162,24.765 27.686,25.141 26.797,25.4 27.432,25.908
NetC1_1: C1.1 U1.3 | length 4.3
  Top Layer w0.254: C1.1 8.255,17.526 8.636,17.907 10.138,17.907 10.434,18.203 U1.3
NetC2_1: C2.1 U2.3 | length 4.4
  Top Layer w0.254: C2.1 59.797,18.034 60.25,17.581 61.416,17.581 61.835,18 U2.3
NetC7_1: C7.1 U1.2 | length 3.8
  Top Layer w0.254: C7.1 9.271,20.574 9.784,20.061 U1.2
NetC7_2: C7.2 U1.1 | length 2.2
  Top Layer w0.254: C7.2 9.071,19.304 9.134,19.241 U1.1
NetC8_1: C8.1 U2.2 | length 4.2
  Top Layer w0.254: C8.1 58.693,20.682 59.963,20.682 61.161,19.484 61.161,18.662 U2.2
NetC8_2: C8.2 U2.1 | length 2.5
  Top Layer w0.254: C8.2 59.467,18.638 U2.1
NetC13_2: C13.2 R1.2 U3.8 | length 3.5
  Top Layer w0.254: R1.2 C13.2 1.911,18.04 U3.8
NetC14_2: C14.2 R2.2 U4.8 | length 3.8
  Top Layer w0.254: U4.8 21.549,13.294 C14.2 22.225,12.7 22.606,12.7 R2.2
NetC17_2: C17.2 R5.2 U5.8 | length 3.8
  Top Layer w0.254: R5.2 C17.2 52.705,17.653 53.219,18.167 U5.8
NetC18_2: C18.2 R6.2 U6.8 | length 4.6
  Top Layer w0.254: U6.8 72.304,13.548 C18.2 73.387,12.465 73.885,12.465 R6.2
NetC19_1: C19.1 U8.6 | length 1.9
  Top Layer w0.254: U8.6 44.948,15.981 45.096,16.129 C19.1
NetC19_2: C19.2 L1.1 U8.2 | length 7.5
  Top Layer w0.254: U8.2 44.056,18.23 44.056,17.307 44.218,17.145 45.212,17.145 45.466,17.399 C19.2
  Top Layer w0.8: U8.2@44.092,18.382 44.092,22.004 L1.1
NetDC1_1: DC1.1 P1.2 U7.2
"NetLED 1_1": "LED 1.1" R14.1 | length 1.4
  Top Layer w0.254: R14.1 17.272,43.688
"NetLED 2_1": "LED 2.1" R15.1 | length 1.4
  Top Layer w0.254: 17.145,46.482 17.272,46.355 R15.1
NetR9_1: R9.1 R10.2 U8.4 | length 3.7
  Top Layer w0.254: U8.4 43.196,15.64 43.196,15.214 R9.1 R10.2
NRST: C30.2 K1.1 R13.1 U11.14 | length 27.4
  Top Layer w0.254: K1.1 13.417,46.577 14.373,46.577 C30.2 R13.1 14.605,42.555 14.605,41.783 18.821,37.567 27.407,37.567 28.662,38.822 U11.14
OUT1: H1.1 R3.1 U3.3 | length 5.7
  Top Layer w0.254: U3.3 4.897,10.978 v1(5.08,10.795)
  Bottom Layer w0.254: v1(5.08,10.795) 5.117,10.832 5.117,11.594 5.461,11.938 6.972,11.938 v1(7.991,10.919)
OUT2: H1.2 R4.1 U4.3 | length 3.4
  Top Layer w0.254: v1(12.84,11.811) 12.934,11.811 13.098,11.975 14.072,11.975 U4.3
  Bottom Layer w0.254: v1(11.166,10.922) 12.055,11.811 v1(12.84,11.811)
OUT3: H2.1 R7.1 U5.3 | length 4.2
  Top Layer w0.254: U5.3 55.071,12.294 55.071,11.35 55.365,11.056 56.434,11.056 56.551,11.173 v1(56.645,11.173)
  Bottom Layer w0.254: v1(56.645,11.173) v1(58.156,11.173)
OUT4: H2.2 R8.1 U6.3 | length 3.4
  Top Layer w0.254: v1(62.992,12.192) 63.029,12.229 64.237,12.229 U6.3
  Bottom Layer w0.254: v1(61.341,11.17) 62.311,12.14 62.94,12.14 v1(62.992,12.192)
PA4: U11.29
PA5: U11.30
PA8: U11.67
PA15: U11.77
PB1: U11.36
PB2: U11.37
PB3: U11.89
PB4: U11.90
PB5: U11.91
PB8: U11.95
PB9: U11.96
PB12: U11.51
PB13: U11.52
PB14: U11.53
PB15: U11.54
PC0: U11.15
PC1: U11.16
PC2: U11.17
PC3: U11.18
PC4: U11.33
PC5: U11.34
PC6: U11.63
PC7: U11.64
PC8: U11.65
PC9: U11.66
PC10: U11.78
PC11: U11.79
PC12: U11.80
PC13: R15.2 U11.7 | length 15.6
  Top Layer w0.254: R15.2 19.939,45.085 20.755,45.901 24.066,45.901 24.095,45.872 27.407,45.872 30.957,42.322 U11.7
PD0: U11.81
PD1: U11.82
PD2: U11.83
PD3: U11.84
PD4: U11.85
PD7: U11.88
PD8: U11.55
PD9: U11.56
PD10: U11.57
PD11: U11.58
PD12: U11.59
PD13: U11.60
PD14: U11.61
PD15: U11.62
PE0: U11.97
PE1: U11.98
PE2: U11.1
PE3: U11.2
PE4: U11.3
PE5: U11.4
PE6: U11.5
PE7: U11.38
PE8: U11.39
PE12: U11.43
PE14: U11.45
PE15: U11.46
PGND: C3.2 C4.2 C5.2 C6.2 C9.2 C10.2 C20.2 C21.1 CC1.1 D1.2 DC1.2 DC1.3 P1.1 R11.2 U1.6 U1.7 U1.10 U1.14 U1.20 U1.28 U1.29 U2.6 U2.7 U2.10 U2.14 U2.20 U2.28 U2.29 U8.1
  other v1: 29.845,13.462 30.607,13.462 31.369,13.462 32.131,13.462 32.893,13.462 33.782,13.462 34.544,13.462 35.433,13.462 30.734,14.351 31.75,14.351 32.766,14.351 30.353,15.113 31.242,15.113 22.098,15.621 22.86,16.002 23.368,16.51 62.738,20.447 63.754,20.447 64.77,20.447 65.786,20.447 66.802,20.447 49.657,20.574 11.43,20.828 12.446,20.828 13.589,20.828 14.605,20.828 15.621,20.828 61.468,21.082 48.26,21.209 49.149,21.209 50.292,21.209 60.452,21.209 62.738,21.463 63.754,21.463 64.77,21.463 65.786,21.463 66.802,21.463 20.193,21.59 11.43,21.717 12.446,21.717 13.589,21.717 14.605,21.717 15.494,21.717 48.641,21.971 49.657,21.971 60.071,21.971 60.833,21.971 61.595,21.971 21.082,22.098 62.738,22.479 63.754,22.479 64.77,22.479 65.786,22.479 66.802,22.479 20.193,22.606 48.26,22.733 49.149,22.733 50.038,22.733 11.43,22.86 12.446,22.86 13.589,22.86 14.605,22.86 15.494,22.86 60.198,22.86 60.96,22.86 21.082,23.114 20.193,23.495 48.641,23.622 49.53,23.622 60.071,23.749 21.082,24.003 20.193,24.384 21.082,24.892 20.193,25.273 21.082,25.781 20.32,26.289 21.082,26.67
PWM1_CH1: U2.27 U11.40 | length 26.2
  Top Layer w0.254: U11.40 41.042,29.872 40.767,29.597 40.767,28.448 43.434,25.781 60.96,25.781 61.185,25.556 U2.27
PWM1_CH2: U2.25 U11.42 | length 25.5
  Top Layer w0.254: U11.42 42.042,30.221 45.593,26.67 62.103,26.67 62.485,26.288 U2.25
PWM1_CH3: U2.23 U11.44 | length 25.9
  Top Layer w0.254: U11.44 43.042,30.11 45.974,27.178 62.992,27.178 63.785,26.385 U2.23
PWM3_CH1: U1.27 U11.31 | length 31.1
  Top Layer w0.254: U1.27 9.784,25.913 12.57,28.699 14.164,30.293 36.393,30.293 36.542,30.441 U11.31
PWM3_CH2: U1.25 U11.32 | length 30.4
  Top Layer w0.254: U1.25 11.125,24.679 11.125,25.317 11.673,25.864 11.673,26.321 14.537,29.185 36.17,29.185 37.042,30.057 U11.32
PWM3_CH3: U1.23 U11.35 | length 30.1
  Top Layer w0.254: U1.23 12.408,24.662 12.408,25.489 15.621,28.702 36.637,28.702 38.542,30.607 U11.35
RXD1: P3.1 U11.69 | length 22.2
  Top Layer w0.254: U11.69 61.499,42.322 62.293,43.116 62.928,43.116 64.072,44.259 64.072,45.021 64.516,45.466 66.548,45.466 P3.1
SWCLK: P3.6 U11.76 | length 10.1
  Top Layer w0.254: U11.76 48.482,47.022 v1(48.514,46.99)
  Bottom Layer w0.254: v1(48.514,46.99) 48.582,46.99 48.836,46.736 52.324,46.736 54.737,44.323 P3.6
SWDIO: P3.5 U11.72 | length 10.6
  Top Layer w0.254: U11.72 50.285,43.822 51.054,43.053 56.261,43.053 P3.5
TXD1: P3.2 U11.68 | length 18.8
  Top Layer w0.254: U11.68 62.357,41.822 64.858,44.323 P3.2 ; P3.2@65.278,44.196 P3.2@65.532,44.45
USART2_RX: P2.1 U11.87 | length 40.9
  Top Layer w0.254: U11.87 40.542,48.416 41.021,48.895 67.945,48.895 71.501,45.339 71.501,42.418 P2.1
USART2_TX: P2.2 U11.86 | length 42.4
  Top Layer w0.254: U11.86 41.042,48.154 41.275,48.387 67.183,48.387 70.231,45.339 70.231,39.878 73.025,37.084 P2.2
V3P3: C9.1 U1.15 U1.16 U1.17 | length 3.6
  Top Layer w0.254: U1.17 U1.16 U1.15 17.584,26.485 C9.1
V3P32: C10.1 U2.15 U2.16 U2.17 | length 3.7
  Top Layer w0.254: U2.17 U2.16 ; C10.1 68.335,26.552 U2.16 ; U2.15 U2.16
VCAP1: C43.2 U11.49 | length 5.2
  Top Layer w0.254: U11.49 45.565,31.599 45.565,30.876 45.797,30.643 48.595,30.643 C43.2
VCAP2: C44.2 U11.73 | length 3.9
  Top Layer w0.254: U11.73 50.545,44.322 C44.2
VDDA: C11.1 C12.1 C15.1 C16.1 C29.1 C33.2 C34.2 U3.5 U3.7 U4.5 U4.7 U5.5 U5.7 U6.5 U6.7 U10.5 U11.21 U11.22 | length 211
  Top Layer w0.254: v1(0.889,21.844) 0.889,12.319 9.144,4.064 v1(13.081,4.064) ; U3.5 5.547,16.85 5.207,16.51 4.445,16.51 4.247,16.708 U3.7 4.247,19.883 C11.1 4.064,22.225 10.563,28.724 10.773,28.724 10.795,28.702 v1(11.303,28.702) v1@11.43,28.702 ; v1(13.936,31.45) 13.99,31.504 21.202,31.504 25.004,35.306 C33.2 25.787,35.322 U11.21 U11.22 ; v1(17.246,10.183) 17.339,10.183 17.571,10.414 C12.1 20.914,11.344 U4.5 19.368,11.344 19.028,11.684 18.923,11.684 18.923,12.454 19.113,12.644 U4.7 ; v1(55.118,24.003) 54.229,23.114 C16.1 54.402,20.401 U5.7 54.402,17.04 54.551,16.891 55.499,16.891 55.702,17.094 U5.5 ; v1(65.405,29.383) 73.233,29.383 75.667,26.949 75.667,11.17 74.405,9.909 73.276,9.909 C15.1 71.717,10.541 70.66,11.598 U6.5 68.942,11.598 68.707,11.833 68.707,12.749 68.856,12.898 U6.7
  Top Layer w0.5: U10.5@62.571,36.891 62.596,36.866 64.343,36.866 C29.1 65.776,38.227 v1(67.31,38.227)
  Bottom Layer w0.254: v1(0.889,21.844) 1.305,22.26 v1(4.071,22.26) ; v1(11.303,28.702) 11.303,28.787 13.936,31.419 v1(13.936,31.45) ; v1(13.081,4.064) 17.246,8.229 v1(17.246,10.183)
  Bottom Layer w0.5: v1(11.303,28.702) 12.573,27.432 27.432,27.432 30.099,24.765 42.926,24.765 43.688,24.003 46.99,24.003 47.942,24.956 54.991,24.956 ; v1(55.118,24.003) 55.099,24.022 55.099,24.848 54.991,24.956 ; v1(67.31,38.227) 67.31,31.288 v1(65.405,29.383) 60.498,29.383 56.07,24.956 54.991,24.956
VDDP: C20.1 C21.2 CC1.2 D1.1 D2.2 U7.3 U8.3
pads on no net: DC1. H1.8 H1.9 H2.8 H2.9 U1.12 U1.13 U1.18 U1.19 U1.21 U2.12 U2.13 U2.18 U2.19 U2.21 U7.1 U8.5 U9.4 U10.4 U12.5

## Polygon pours and split planes (outlines as drawn)
GND on Top Layer "GND_L01_P039" (solid, remove dead copper, pour order 39): 0,0 0,50 80,50 80,0
PGND on Top Layer "PGND_L01_P034" (solid, pour order 34): 30.226,17.78 28.437,15.991 27.94,15.991 27.94,13.97 29.083,12.827 37.338,12.827 44.45,5.715 44.45,2.794 46.736,2.794 48.387,4.445 51.435,4.445 52.07,5.08 52.07,11.049 50.673,12.446 50.673,23.622 50.038,24.257 46.99,24.257 44.45,21.717 44.45,18.542 41.91,16.002 37.465,16.002 35.306,18.161 30.226,18.161
VDDP on Top Layer "VDDP_L01_P012" (solid, pour order 12): 30.226,18.542 30.226,17.78 28.448,16.002 27.94,16.002 27.94,14.224 29.337,12.827 30.48,12.827 31.369,11.938 31.369,10.033 30.607,9.271 26.289,9.271 24.13,11.43 24.13,16.891 28.194,20.955 28.194,22.098
M_PWR on Top Layer "M_PWR_L01_P009" (solid, pour order 9): 27.607,26.718 21.844,20.955 21.844,19.05 23.241,17.653 23.241,17.018 27.178,20.955 27.178,22.479 29.718,25.019 29.718,26.718
PGND on Top Layer "PGND_L01_P031" (solid, remove dead copper, pour order 31): 8.001,24.892 8.001,21.374 14.135,15.24 22.479,15.24 24.511,17.272 24.511,27.432 23.622,28.321 10.183,28.321
AGND on Top Layer "AGND_L01_P025" (solid, pour order 25): 12.954,13.716 13.843,14.605 24.003,14.605 24.257,14.351 24.257,9.652 23.622,9.017 14.732,9.017 12.954,10.795
M1_CS3 on Top Layer "M1_CS3_L01_P004" (solid, pour order 4): 13.97,19.812 13.97,16.51 15.494,14.986 15.494,11.176 13.97,9.652 13.97,4.826 14.097,4.699 14.859,4.699 15.367,5.207 15.367,8.382 18.288,11.303 18.288,13.97 14.605,17.653 14.605,19.812
OUT2 on Top Layer "OUT2_L01_P001" (solid, pour order 1): 10.16,11.684 10.16,9.144 10.795,8.509 12.065,8.509 12.446,8.128 12.446,4.953 12.7,4.699 13.462,4.699 13.843,5.08 13.843,9.906 12.065,11.684
PGND on Top Layer "PGND_L01_P033" (solid, pour order 33): 59.69,24.892 61.214,26.416 65.405,26.416 66.167,27.178 74.168,27.178 74.93,26.416 74.93,22.606 73.406,22.606 71.755,20.955 71.755,15.748 67.183,15.748 65.024,17.907 62.357,17.907 59.69,20.574
M_PWR on Top Layer "M_PWR_L01_P020" (solid, pour order 20): 66.675,19.558 66.675,17.399 66.802,17.272 66.802,17.018 67.564,16.256 69.596,16.256 70.485,17.145 71.755,17.145 71.755,16.256 72.009,16.002 74.803,16.002 75.311,16.51 75.311,20.574 73.787,22.098 73.279,22.098 68.961,17.78 67.31,17.78 67.31,19.558
AGND on Top Layer "AGND_L01_P023" (solid, pour order 23): 63.119,13.843 63.881,14.605 74.676,14.605 75.311,13.97 75.311,10.287 74.803,9.779 64.516,9.779 63.119,11.176
VDDP on Top Layer "VDDP_L01_P010" (solid, pour order 10): 27.813,22.733 27.813,17.907 27.94,17.78 28.067,17.907 35.56,17.907 36.957,16.51 40.259,16.51 40.259,16.383 41.021,15.621 41.148,15.748 41.783,15.748 41.783,16.383 43.434,18.034 43.434,19.177 37.338,19.177 35.179,21.336 35.179,22.86 27.94,22.86
AGND on Top Layer "AGND_L01_P021" (solid, pour order 21): 50.927,21.844 51.054,21.717 56.642,21.717 57.15,21.209 57.15,11.938 56.134,10.922 52.324,10.922 50.927,12.319
M_PWR on Top Layer "M_PWR_L01_P019" (solid, pour order 19): 62.738,19.558 62.738,17.653 61.595,16.51 59.817,16.51 59.436,16.129 58.039,16.129 58.039,17.272 58.166,17.399 59.309,17.399 59.69,17.78 61.976,17.78 62.103,17.907 62.103,19.558
AGND on Top Layer "AGND_L01_P024" (solid, pour order 24): 1.143,21.844 1.016,21.717 1.016,12.827 3.937,9.906 6.223,9.906 6.731,10.414 6.604,10.541 6.604,20.955 5.715,21.844
M2_CS1 on Top Layer "M2_CS1_L01_P018" (solid, pour order 18): 63.373,19.558 63.373,16.51 62.23,15.367 60.579,15.367 59.563,14.351 59.563,13.208 57.277,13.208 57.277,14.859 58.547,16.129 59.436,16.129 59.69,16.383 61.468,16.383 62.738,17.653 62.738,19.558
M2_CS2 on Top Layer "M2_CS2_L01_P017" (solid, pour order 17): 62.23,13.208 65.405,16.383 65.405,19.431 65.278,19.558 64.77,19.558 64.643,19.431 64.643,17.653 62.103,15.113 60.452,15.113 60.452,13.208
M2_CS3 on Top Layer "M2_CS3_L01_P016" (solid, pour order 16): 62.357,5.08 62.357,8.636 64.008,10.287 65.024,10.287 65.405,10.668 65.405,17.526 65.405,19.431 65.532,19.558 66.04,19.558 66.04,16.891 67.437,15.494 67.437,10.414 65.532,8.509 64.389,8.509 63.627,7.747 63.627,5.08
OUT4 on Top Layer "OUT4_L01_P015" (solid, pour order 15): 60.452,12.065 60.452,9.906 60.452,4.953 61.976,4.953 61.976,5.08 62.23,5.334 62.23,12.065
OUT3 on Top Layer "OUT3_L01_P014" (solid, pour order 14): 57.15,11.938 57.15,6.858 59.055,4.953 60.452,4.953 60.452,9.398 59.436,10.414 59.436,11.938
NetDC1_1 on Top Layer "NETDC1_1_L01_P013" (solid, pour order 13): 52.07,7.874 55.372,7.874 55.626,7.62 55.626,0 34.036,0 32.766,1.27 36.449,4.953 44.069,4.953 44.704,4.318 44.704,2.032 47.244,2.032 47.117,2.159 47.117,4.445 51.435,4.445 52.07,5.08
NetDC1_1 on Top Layer "NETDC1_1_L01_P011" (solid, pour order 11): 33.147,10.922 30.988,8.763 27.432,8.763 27.432,0.889 37.211,0.889 37.211,10.922
M_PWR on Top Layer "M_PWR_L01_P007" (solid, pour order 7): 11.43,19.685 11.43,18.161 9.525,16.256 8.763,16.256 8.128,15.621 6.731,15.621 6.731,16.891 6.858,17.018 8.509,17.018 9.652,18.161 10.668,18.161 10.668,19.685 10.922,19.939 11.303,19.939
M_PWR on Top Layer "M_PWR_L01_P006" (solid, pour order 6): 21.082,20.193 20.955,20.193 18.923,18.161 16.129,18.161 15.875,18.415 15.875,19.685 15.748,19.812 15.494,19.812 15.494,19.685 15.367,19.558 15.367,17.78 15.494,17.653 16.51,16.637 18.669,16.637 19.177,17.145 20.701,17.145 20.955,17.399 21.717,17.399
M_PWR on Top Layer "M_PWR_L01_P005" (solid, pour order 5): 20.32,17.145 21.082,17.907 21.082,20.193 21.844,20.955 23.241,20.955 23.241,16.891 22.479,16.129 20.32,16.129
M1_CS2 on Top Layer "M1_CS2_L01_P003" (solid, pour order 3): 12.065,12.954 12.065,14.478 13.97,16.383 13.97,19.812 13.335,19.812 13.335,18.161 10.096,14.922 10.096,12.954
M1_CS1 on Top Layer "M1_CS1_L01_P002" (solid, pour order 2): 11.557,19.812 11.43,19.685 11.43,17.907 9.779,16.256 8.763,16.256 6.985,14.478 6.985,12.954 8.763,12.954 9.652,13.843 9.652,14.859 12.065,17.272 12.065,19.685 11.938,19.812
OUT1 on Top Layer "OUT1_L01_P000" (solid, pour order 0): 7.112,11.811 8.89,11.811 8.89,10.033 10.668,8.255 11.557,8.255 12.065,7.747 12.065,4.826 11.684,4.445 8.636,4.445 7.239,5.842
GND on Bottom Layer "GND_L02_P040" (solid, remove dead copper, pour order 40): 0,0 0,50 80,50 80,0
PGND on Bottom Layer "PGND_L02_P038" (solid, pour order 38): 48.641,24.257 47.625,23.241 47.625,21.209 48.514,20.32 48.514,20.193 61.214,20.193 62.103,21.082 62.103,22.86 60.706,24.257
AGND on Bottom Layer "AGND_L02_P028" (solid, pour order 28): 21.59,14.605 22.479,13.716 22.479,10.033 21.463,9.017 4.572,9.017 1.143,12.446 1.143,15.24 2.159,16.256 6.35,16.256 8.001,14.605
AGND on Bottom Layer "AGND_L02_P029" (solid, pour order 29): 50.927,15.621 51.308,16.002 73.914,16.002 75.057,14.859 75.057,10.16 74.295,9.398 53.594,9.398 50.927,12.065
PGND on Bottom Layer "PGND_L02_P036" (solid, pour order 36): 24.384,27.559 24.511,27.432 24.511,23.876 23.749,23.114 23.749,17.907 25.781,15.875 35.814,15.875 36.957,14.732 36.957,12.954 36.322,12.319 25.019,12.319 19.431,17.907 19.431,26.035 20.955,27.559
M_PWR on Bottom Layer "M_PWR_L02_P032" (solid, pour order 32): 26.924,26.289 23.749,23.114 23.749,17.907 25.527,16.129 73.279,16.129 74.803,17.653 74.803,22.606 73.406,24.003 72.009,24.003 65.659,17.653 27.686,17.653 25.654,19.685 25.654,22.352 27.559,24.257 27.94,24.257 27.94,26.289
AGND on Bottom Layer "AGND_L02_P030" (solid, pour order 30): 67.945,10.16 67.056,9.271 67.056,-0.127 11.811,-0.127 6.858,4.826 6.858,10.033 12.573,10.033 10.922,8.382 10.922,5.207 13.081,3.048 61.722,3.048 64.77,6.096 64.77,8.509 61.849,11.43
M_PWR on Bottom Layer "M_PWR_L02_P008" (solid, pour order 8): 7.874,16.764 8.763,17.653 18.542,17.653 18.796,17.399 18.796,16.764 17.907,15.875 8.128,15.875 7.874,16.129

## Keep-outs
Keep-Out Layer:
  circle w0.1: c76,46 r2
  circle w0.1: c76,4 r2
  circle w0.1: c4,4 r2
  circle w0.1: c4,46 r2
  circle w0.1: c76,46 r1.25
  circle w0.1: c76,4 r1.25
  circle w0.1: c4,4 r1.25
  circle w0.1: c4,46 r1.25
  lines w0.1: 0,0 0,50 80,50 80,0 0,0

## Silkscreen, mask and mechanical layers (free items; w line width, h text height)
Top Overlay:
  text "CLK" at 55.482,39.497 h1.52 r90
  text "DIO" at 58.022,39.497 h1.52 r90
  text "GND" at 60.562,39.497 h1.52 r90
  text "3.3V" at 63.102,39.497 h1.52 r90
  text "TXD" at 65.786,39.37 h1.52 r90
  text "RXD" at 68.326,39.37 h1.52 r90
  text "FOC DRIVER V1.0" at 12.827,29.486 h2
  text "2024.2 TIANXIAOHUA" at 12.699,28.084 h1.52
  text "SCL" at 63.898,10.668 h1.52 r270
  text "SDA" at 65.295,10.668 h1.52 r270
  text "SCL" at 15.511,10.541 h1.52 r270
  text "SDA" at 16.908,10.541 h1.52 r270
  text "GND" at 68.343,10.541 h1.52 r270
  text "GND" at 19.956,10.414 h1.52 r270
  text "3.3" at 66.819,9.779 h1.52 r270
  text "3.3" at 18.432,9.652 h1.52 r270
  text "GND" at 48.895,9.034 h1.52
  text "12v" at 52.578,9.017 h1.52
  text "C" at 62.484,8.145 h1.52
  text "A" at 59.436,8.128 h1.52
  text "B" at 60.96,8.128 h1.52
  text "C" at 14.097,8.018 h1.52
  text "A" at 11.049,8.001 h1.52
  text "B" at 12.573,8.001 h1.52
Top Solder:
  circle w1: c76,4 r1.5
  circle w1: c76,46 r1.5
  circle w1: c4,46 r1.5
  circle w1: c4,4 r1.5
Bottom Solder:
  circle w1: c76,4 r1.5
  circle w1: c76,46 r1.5
  circle w1: c4,46 r1.5
  circle w1: c4,4 r1.5

## Dimensions
2.5,46 to 0,50 on Mechanical 5
2.75,46 to 5.25,46 on Mechanical 5
0,50 to 80,50 on Mechanical 5
0,50 to 0,0 on Mechanical 5

## Text inside footprints (layer, text, board x,y; h text height)
X2: Top Overlay "*" at 19.675,42.799 h1.52 r270